# Altium PCB Залозных.PcbDoc
Units mm, origin at the board's own origin, x right, y up, seen from the top; angles counter-clockwise.
Board outline 50 x 110 mm, 2 copper layers (Top Layer, Bottom Layer), stack 0.274 mm thick; 62 components, 44 nets, 228 pads, 22 vias.
Unrouted connection lines stored in the file: 1.
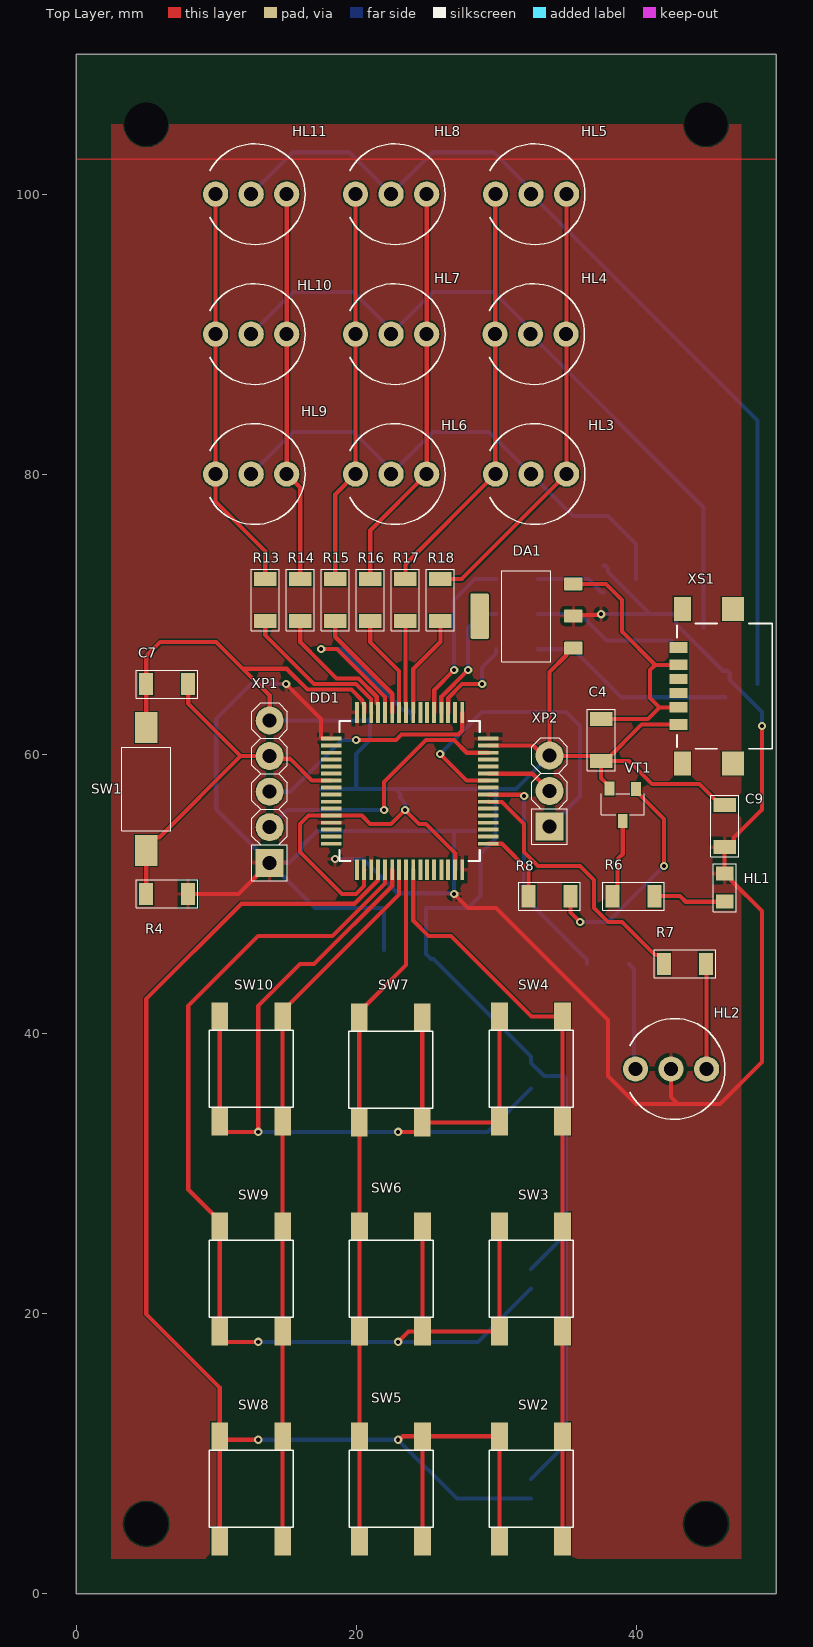
[diagram p0: Top Layer view]
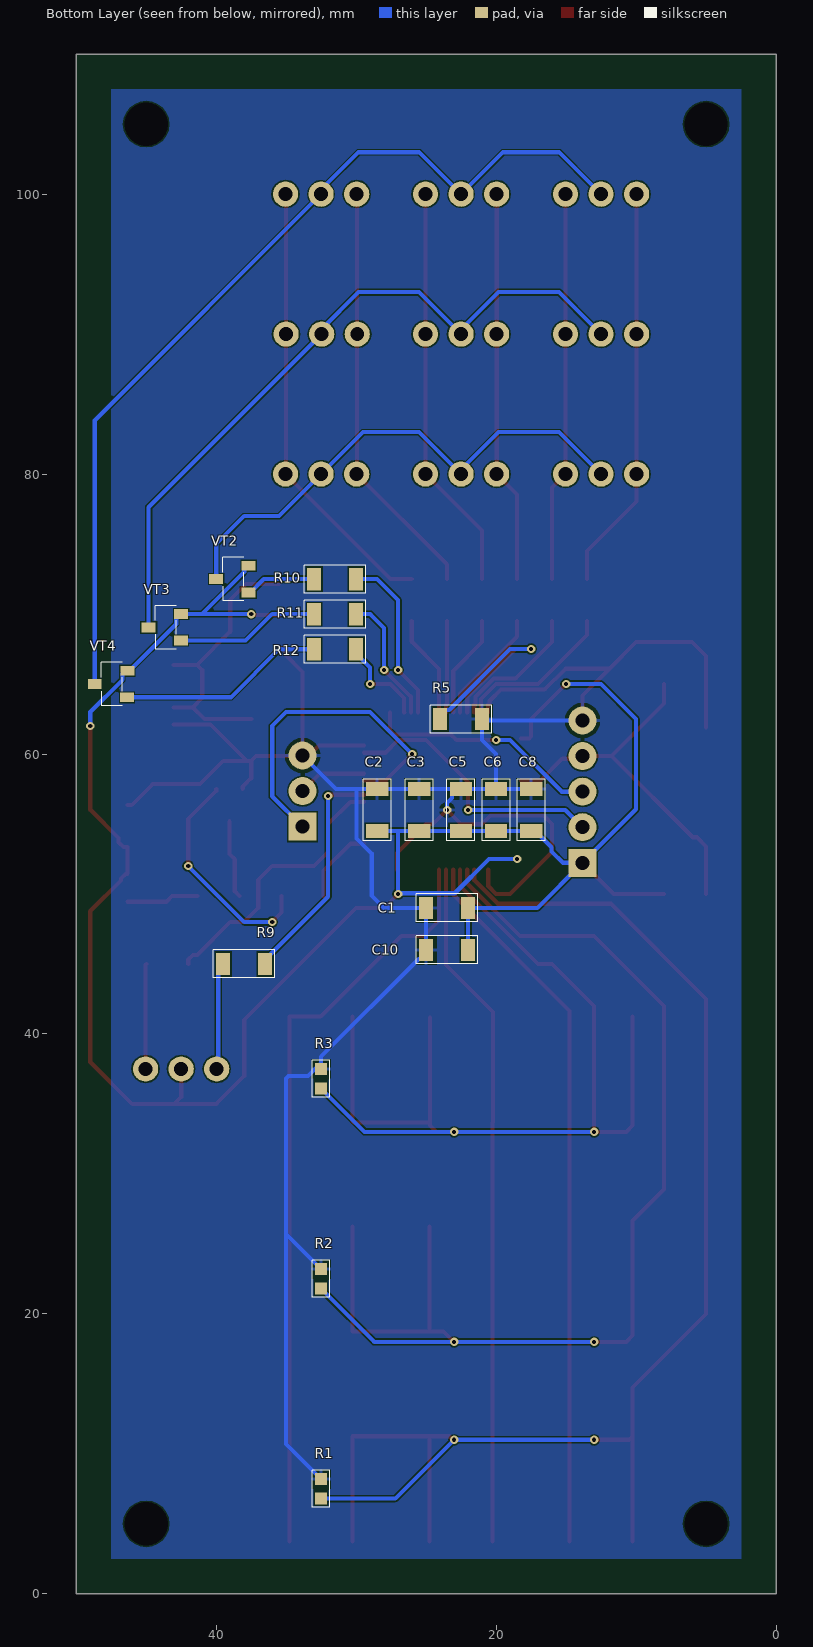
[diagram p1: Bottom Layer view, seen from below]
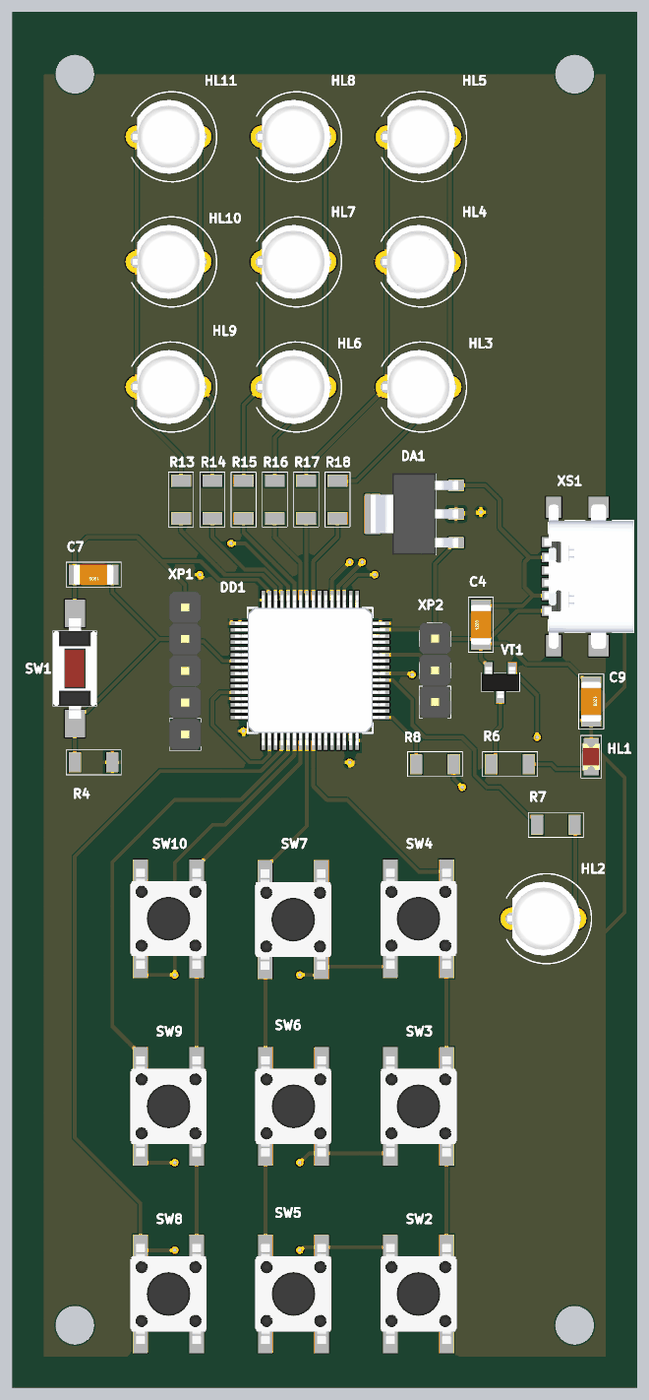
[diagram p2: 3D render of the assembled board from above, using the file's embedded part models]
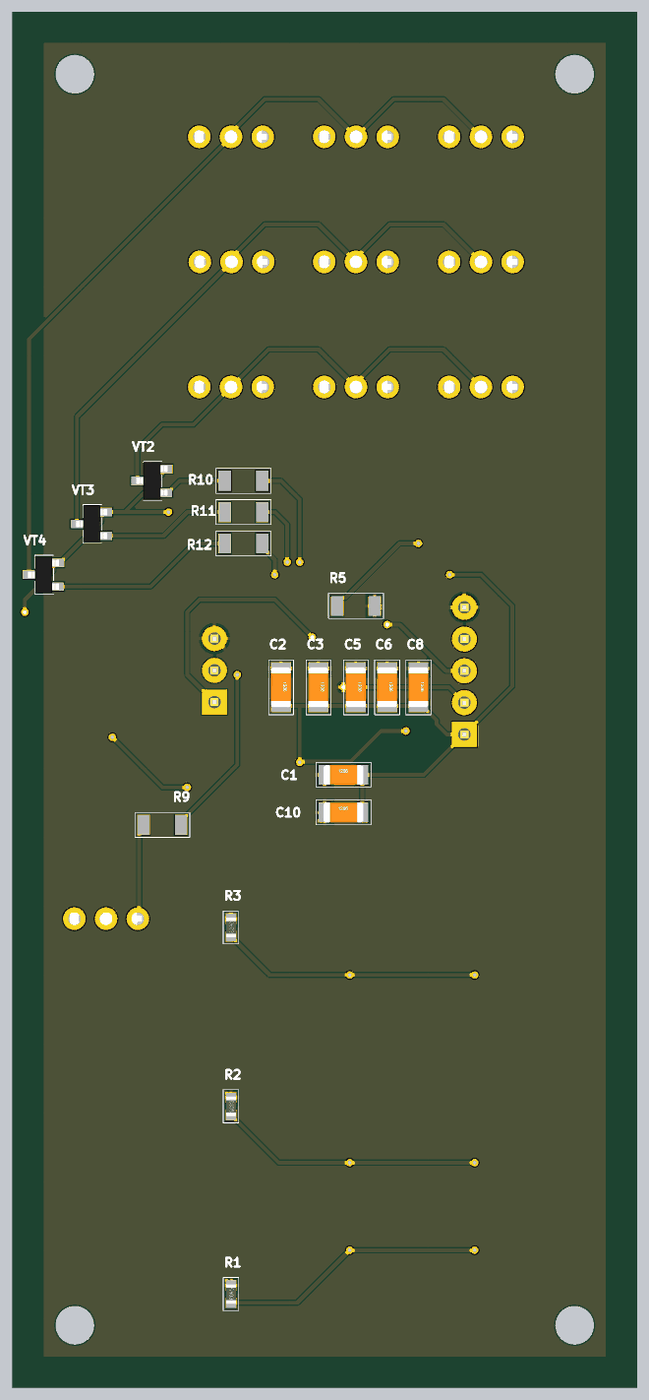
[diagram p3: 3D render of the assembled board from below, using the file's embedded part models]

## Layer stack, top to bottom
Top Solder: solder mask 0.0102, Solder Resist, Dk 3.5
Top Layer: signal copper 0.0356
Dielectric 1: core 0.2032, FR-4, Dk 4.6
Bottom Layer: signal copper 0.0356
Bottom Solder: solder mask 0.0102, Solder Resist, Dk 3.5

## Board outline
0,0 50,0 50,110 0,110

## Design rules (kind name [scope] priority, off if disabled: settings)
Clearance [All] p1: gap=0.1 ignorepadtopadclearanceinfootprint=FALSE
PolygonConnect [All] p1: connectstyle=Relief reliefconductorwidth=0.254 reliefentries=4 polygonreliefangle="90 Angle" airgapwidth=0.254
RoutingVias [All] p1: holewidth=0.711 width=1.27 viastyle="Through Hole" minholewidth=0.3 minwidth=0.6 maxholewidth=0.711 maxwidth=1.27
SolderMaskExpansion [All] p1: expansion=0.102 istentingtop=FALSE
Width [All] p1: maxlimit=0.5 minlimit=0.1 preferedwidth=0.3
30 further rules are at their usual default settings.

## Classes and differential pairs
component class Sheet1: C1 C2 C3 C4 C5 C6 C7 C8 C9 C10 DA1 DD1 HL1 HL2 HL3 HL4 HL5 HL6 HL7 HL8 HL9 HL11 R1 R2 R3 R4 R5 R6 R7 R8 R9 R10 R11 R12 R13 R14 R15 R16 R17 R18 SW1 SW2 SW3 SW4 SW5 SW6 SW7 SW8 SW9 SW10 VT1 VT2 VT3 VT4 XP1 XP2 XS1

## Components (designator, comment, footprint, x,y, rotation, side; value= is the part's Value field where it differs from the comment)
C1 "10 нФ" "CAP: 1206" 23.5,49 r180 bottom
C2 "100 нФ" "CAP: 1206" 28.5,56 r270 bottom
C3 "100 нФ" "CAP: 1206" 25.5,56 r270 bottom
C4 "10 мкФ" "CAP: 1206" 37.5,61 r90 top
C5 "100 нФ" "CAP: 1206" 22.509,56 r270 bottom
C6 "100 нФ" "CAP: 1206" 20.004,56 r270 bottom
C7 "10 мкФ" "CAP: 1206" 6.5,65 r180 top
C8 "10 мкФ" "CAP: 1206" 17.5,56 r270 bottom
C9 "1 мкФ" "CAP: 1206" 46.325,54.85 r270 top
C10 "22 мкФ" "CAP: 1206" 23.5,46 r180 bottom
DA1 "LM7805ACT" AMS1117-3.3 32.17,69.85 r180 top
DD1 "MK" QFP50P1200X1200X160-64N 23.825,57.35 r0 top
HL1 "LED" "LED: 0805R" 46.325,50.446 r270 top
HL2 "Bi_LED_OA" "LED: 5mm bi_color" 42.5,37.5 r0 top
HL3 "Bi_LED_OA" "LED: 5mm bi_color" 32.5,80 r0 top
HL4 "Bi_LED_OA" "LED: 5mm bi_color" 32.46,90 r0 top
HL5 "Bi_LED_OA" "LED: 5mm bi_color" 32.5,100 r0 top
HL6 "Bi_LED_OA" "LED: 5mm bi_color" 22.5,80 r0 top
HL7 "Bi_LED_OA" "LED: 5mm bi_color" 22.5,90 r0 top
HL8 "Bi_LED_OA" "LED: 5mm bi_color" 22.5,100 r0 top
HL9 "Bi_LED_OA" "LED: 5mm bi_color" 12.5,80 r0 top (schematic designator HL10)
HL10 "Bi_LED_OA" "LED: 5mm bi_color" 12.5,90 r0 top (schematic designator HL9)
HL11 "Bi_LED_OA" "LED: 5mm bi_color" 12.5,100 r0 top
R1 "2 кОм" "RES: 0603" 32.5,7.5 r270 bottom
R2 "2 кОм" "RES: 0603" 32.5,22.5 r270 bottom
R3 "2 кОм" "RES: 0603" 32.5,36.8 r270 bottom
R4 "10 кОм" "RES: 1206"#1 6.5,50 r0 top
R5 "10 кОм" "RES: 1206"#1 22.5,62.5 r0 bottom
R6 "50 Ом" "RES: 1206"#1 39.825,49.85 r0 top
R7 "200 Ом" "RES: 1206"#1 43.5,45 r180 top
R8 "2 кОм" "RES: 1206"#1 33.825,49.85 r0 top
R9 "200 Ом" "RES: 1206"#1 38,45 r180 bottom
R10 "2 кОм" "RES: 1206"#2 31.5,72.5 r0 bottom
R11 "2 кОм" "RES: 1206"#1 31.5,69.996 r0 bottom
R12 "2 кОм" "RES: 1206"#1 31.5,67.491 r0 bottom
R13 "65 Ом" "RES: 1206"#1 13.5,71 r90 top
R14 "50 Ом" "RES: 1206"#1 16.004,71 r90 top
R15 "65 Ом" "RES: 1206"#1 18.509,71 r90 top
R16 "50 Ом" "RES: 1206"#1 21.013,71 r90 top
R17 "65 Ом" "RES: 1206"#1 23.517,71 r90 top
R18 "50 Ом" "RES: 1206"#1 26.021,71 r90 top
SW1 "SWITCH_Button" Button_1437566-3 5,57.5 r90 top
SW2 "SWITCH_Button" Button_6mm 32.5,7.5 r90 top
SW3 "SWITCH_Button" Button_6mm 32.5,22.5 r90 top
SW4 "SWITCH_Button" Button_6mm 32.5,37.5 r90 top
SW5 "SWITCH_Button" Button_6mm 22.5,7.5 r270 top
SW6 "SWITCH_Button" Button_6mm 22.5,22.5 r270 top
SW7 "SWITCH_Button" Button_6mm 22.475,37.425 r270 top
SW8 "SWITCH_Button" Button_6mm 12.5,7.5 r90 top
SW9 "SWITCH_Button" Button_6mm 12.5,22.5 r90 top
SW10 "SWITCH_Button" Button_6mm 12.5,37.5 r90 top
VT1 "BC847" BC846B 39.05,56.375 r180 top
VT2 "=Value" BC857 38.825,72.5 r90 bottom
VT3 "=Value" BC857 43.65,69.05 r90 bottom
VT4 "=Value" BC857 47.5,65 r90 bottom
XP1 "ST-LINK" "CON: PLS-5" 13.825,57.31 r90 top
XP2 "USB UART" "CON: PLS-3" 33.825,57.35 r90 top
XS1 "USB_C" USB_type_C 46.325,64.85 r90 top
ZBOAS601991354 "Слой 2" "BOASVIEWlayer:Bottom Layer:1:1:32:1" 105,2290 r90 top (schematic designator fewf)
ZBOAS601994503 "Comment" "BOASVIEWside:Вид платы слева:1:0:0:0" 105,2370 r270 top
ZBOAS601995685 "Слой 1" "BOASVIEWlayer:Top Layer:1:1:1:1" 105,2400 r90 top (schematic designator fewf)
ZBOAS810698153 "Comment" "BOASVIEWdrill:Таблица отверстий:0:0:0:0" 158,2462.7 r0 top

## Footprints (in the part's own frame and the unit in brackets; to place one, negate y for a bottom-side part, rotate by r counter-clockwise, add the part's x,y. Pads: shape width x height; smd on the part's side, far side on the other; paste and mask are expansions set on the pad)
AMS1117-3.3 [mm]
  rrect15% 1.31x0.93 smd paste-0.025 mask+0.05: 1(-3.345,2.29) 2(-3.345,0) 3(-3.345,-2.29)
  rrect15% 1.31x3.24 smd paste-0.025 mask+0.05: 4(3.345,0)
  silkscreen extent -1.75,-3.25 1.75,3.25, body extent -3.5,-3.25 3.5,3.25, height 1.8
BC846B [mm]
  rect 0.7x1 smd paste-0.025 mask+0.05: B(-0.95,-1.125) C(0,1.175) E(0.95,-1.15)
  silkscreen extent -1.55,-0.8 1.55,0.7, body extent -1.5,-1.25 1.5,1.25, height 1.05
BC857 [mm]
  rect 0.7x1 smd paste-0.025 mask+0.05: B(-0.95,-1.125) C(0,1.175) E(0.95,-1.15)
  silkscreen extent -1.55,-0.8 1.55,0.7, body extent -1.5,-1.25 1.5,1.25, height 1.05
"BOASVIEWdrill:Таблица отверстий:0:0:0:0" [mm]
"BOASVIEWlayer:Bottom Layer:1:1:32:1" [mm]
"BOASVIEWlayer:Top Layer:1:1:1:1" [mm]
"BOASVIEWside:Вид платы слева:1:0:0:0" [mm]
Button_6mm [mm]
  rect 2x1.2 smd paste-0.025 mask+0.05: 1(-3.75,2.25) 1(3.75,2.25) 2(-3.75,-2.25) 2(3.75,-2.25)
  silkscreen extent -2.75,-3 2.75,3, body extent -4,-3 4,3, height 5.1
Button_1437566-3 [mm]
  rect 2.2x1.6 smd: 1(-4.4,0) 2(4.4,0)
  silkscreen extent -3,-1.75 3,1.75, body extent -4,-1.75 4,1.75, height 4.3
"CAP: 1206" [mm]
  rect 1x1.6 smd paste-0.025 mask+0.05: 1(-1.5,0) 2(1.5,0)
  silkscreen extent -2.2,-1 2.2,1, body extent -1.6,-0.8 1.6,0.8, height 1
"CON: PLS-3" [mm]
  rect 2x2 hole 1 paste-0.025 mask+0.05: 1(-2.54,0)
  round 2 hole 1 paste-0.025 mask+0.05: 2(0,0) 3(2.54,0)
  silkscreen extent -3.81,-1.27 3.81,1.27, body extent -3.81,-1.27 3.81,1.27, height 8.54
"CON: PLS-5" [mm]
  rect 2x2 hole 1: 1(-5.08,0)
  round 2 hole 1: 2(-2.54,0) 3(0,0) 4(2.54,0) 5(5.08,0)
  silkscreen extent -6.35,-1.27 6.35,1.27, body extent -6.35,-1.27 6.35,1.27, height 8.54
"LED: 5mm bi_color" [mm]
  round 1.8 hole 1: gre(2.54,0) oa(0,0) red(-2.54,0)
  silkscreen extent -2.94,-3.6 3.85,3.6, body extent -2.89,-2.95 2.94,2.95, height 13.1
"LED: 0805R" [mm]
  rect 1x1.25 smd paste-0.025 mask+0.05: 1(-1,0) 2(1,0)
  silkscreen extent -1.7,-0.82 1.7,0.82, body extent -1.05,-0.67 1.05,0.68, height 0.9
QFP50P1200X1200X160-64N [mil]
  rect 58x11 smd: 1(-221,148) 2(-221,128) 3(-221,108) 4(-221,89) 5(-221,69) 6(-221,49) 7(-221,30) 8(-221,10) 9(-221,-10) 10(-221,-30) 11(-221,-49) 12(-221,-69) 13(-221,-89) 14(-221,-108) 15(-221,-128) 16(-221,-148) 33(221,-148) 34(221,-128) 35(221,-108) 36(221,-89) 37(221,-69) 38(221,-49) 39(221,-30) 40(221,-10) 41(221,10) 42(221,30) 43(221,49) 44(221,69) 45(221,89) 46(221,108) 47(221,128) 48(221,148)
  rect 11x58 smd: 17(-148,-221) 18(-128,-221) 19(-108,-221) 20(-89,-221) 21(-69,-221) 22(-49,-221) 23(-30,-221) 24(-10,-221) 25(10,-221) 26(30,-221) 27(49,-221) 28(69,-221) 29(89,-221) 30(108,-221) 31(128,-221) 32(148,-221) 49(148,221) 50(128,221) 51(108,221) 52(89,221) 53(69,221) 54(49,221) 55(30,221) 56(10,221) 57(-10,221) 58(-30,221) 59(-49,221) 60(-69,221) 61(-89,221) 62(-108,221) 63(-128,221) 64(-148,221)
  silkscreen extent -197,-197 197,197, body extent -236,-236 236,236, height 64
"RES: 0603" [mm]
  rect 0.85x0.85 smd paste-0.025 mask+0.05: 1(-0.7,0) 2(0.7,0)
  silkscreen extent -1.33,-0.63 1.33,0.63, body extent -0.8,-0.4 0.8,0.4, height 0.44
"RES: 1206"#1 [mm]
  rect 1x1.6 smd paste-0.025 mask+0.05: 1(-1.5,0) 2(1.5,0)
  silkscreen extent -2.2,-1 2.2,1, body extent -1.58,-0.82 1.58,0.82, height 0.53
"RES: 1206"#2 [mm]
  rect 1x1.6 smd: 1(-1.5,0) 2(1.5,0)
  silkscreen extent -2.2,-1 2.2,1, body extent -1.58,-0.83 1.57,0.82, height 0.53
USB_type_C [mm]
  rect 0.76x1.3 smd: 1(-1.52,3.29) 1(1.52,3.29)
  rect 0.8x1.3 smd: 2(-2.75,3.29) 2(2.75,3.29)
  rect 0.7x1.3 smd: A5(-0.5,3.29) B5(0.5,3.29)
  rect 1.7x1.2 smd: SH1(-5.52,3) SH2(5.52,3)
  rect 1.7x1.6 smd: SH3(-5.52,-0.6) SH4(5.52,-0.6)
  silkscreen extent -4.47,-3.4 4.47,3.4, body extent -5.77,-3.4 5.77,3.74, height 3.16

## Part data
C1 C2 C3 C4 C5 C6 C7 C8 C9 C10: library part Capacitor
DA1: library part Stabilizator, Manufacturer_Name="ON Semiconductor", Mouser Part Number=512-LM7805ACT, Arrow Part Number=LM7805ACT, Arrow Price/Stock=https://www.arrow.com/en/products/lm7805act/on-semiconductor, Datasheet Link=https://componentsearchengine.com/Datasheets/2/LM7805ACT.pdf, Height=4.7mm, Manufacturer_Part_Number=LM7805ACT, Mouser Price/Stock=https://www.mouser.co.uk/ProductDetail/ON-Semiconductor-Fairchild/LM7805ACT?qs=VOMQJJE%252BBNlQknJDd4ZVLg%3D%3D
R1 R2 R3 R4 R5 R6 R7 R8 R9 R10 R11 R12 R13 R14 R15 R16 R17 R18: library part R
VT1: library part VT_bc846
VT2 VT3 VT4: library part VT_bc856
XP1: library part "ST LINK"

## Free pads (board coordinates)
  round 0 hole 3.1 unplated: 2(5,5) 3(45,5) 4(5,105) 5(45,105)

## Via types
v1: diameter 0.6, hole 0.3, Top Layer to Bottom Layer, 22 vias

## Nets (pads, with @x,y where several pads share a name; then routed paths per layer and width w, separated by ;. In a path a pad name is that pad's centre, name@x,y a point inside that pad or via, vN(x,y) a via of type N, cw(c..) or ccw(c..) an arc to the next point about the centre after c; other vN are vias at no path point)
+3.3: C1.2 C2.2 C3.2 C5.2 C6.2 C8.2 C9.2 C10.2 DA1.2 DD1.1 DD1.13 DD1.19 DD1.32 DD1.48 DD1.64 HL1.1 HL2.oa R4.2 VT2.E VT3.E VT4.E XP1.1 | length 156.4
  Top Layer w0.3: R4.2 11.595,50 XP1.1 ; v1(15,65) 17.5,62.5 17.5,61.244 17.635,61.109 DD1.1 ; v1(27,50) 28,49 30,49 38,41 38,37 40,35 43,35 ; DA1.2 35.608,69.943 37.443,69.943 v1(37.5,70) ; HL2.oa 42.5,35.5 43,35 ; v1(49,62) 49,56.025 46.975,54 46.975,53.7 46.625,53.35 C9.2 HL1.1 46.45,51.446 46.8,51.096 46.8,50.971 49,48.771 49,38 46,35 43,35
  Bottom Layer w0.3: v1(15,65) 12.5,65 10,62.5 10,56.055 XP1.1 ; v1(18.5,52.5) 20.5,52.5 22.95,50.05 26.95,50.05 v1(27,50) 27,54.5 ; C10.2 C1.2 17.055,49 XP1.1 ; C2.2 27,54.5 ; v1(37.5,70) 41,70 ; VT2.E 37.8,73.45 38,73.25 38,73 41,70 ; v1(49,62) 49,63 46.7,65.3 46.7,65.75 46.5,65.95 VT4.E 46.2,65.95 42.85,69.3 42.85,69.8 42.65,70 VT3.E 41,70 ; XP1.1 15.23,52.23 16.04,53.04 16.04,53.34 17.2,54.5 C8.2 C6.2 C5.2 C3.2 27,54.5
+5: C4.2 DA1.3 XS1.1 | length 20.6
  Top Layer w0.3: DA1.3 37.86,72.14 39,71 39,68.74 41.37,66.37 ; C4.2 40.84,62.5 41.67,63.33 ; XS1.1@43.035,63.33 41.67,63.33 ; XS1.1@43.035,66.37 41.37,66.37 ; 41.37,66.37 41,66 41,64 41.67,63.33
GND: C1.1 C2.1 C3.1 C4.1 C5.1 C6.1 C7.2 C8.1 C9.1 C10.1 DA1.1 DD1.12 DD1.18 DD1.31 DD1.47 DD1.63 R1.1 R2.1 R3.1 R5.1 SW1.2 VT1.E XP1.5 XP2.3 XS1.2 | length 181.9
  Top Layer w0.3: SW1.2 C7.2 5,67 6,68 10,68 11.913,66.088 ; XP1.5 13.825,64.175 11.913,66.088 ; DD1.18 20.563,51.726 20.563,50.563 20,50 19,50 16,53 16,55 16.597,55.597 DD1.12 20.403,55.597 21,55 22.5,55 v1(23.5,56) 24.5,55 25,55 27.076,52.924 DD1.31 ; DD1.63 20.574,63.54 20.455,63.658 20.455,63.804 19.659,64.6 16.53,64.6 15.042,66.088 11.913,66.088 ; DD1.47 32.654,60.601 33.365,59.89 XP2.3 ; DA1.1 35.325,67.56 35.01,67.245 35.01,67.055 33.825,65.87 XP2.3 ; VT1.E 38.1,57.675 37.5,58.275 C4.1 ; XS1.2@43.035,62.1 40.4,62.1 C4.1@37.8,59.5 ; C9.1 46.025,56.35 44.525,57.85 41.15,57.85 39.5,59.5 C4.1@37.8,59.5 ; XP2.3 33.865,59.85 37.15,59.85 C4.1 ; C4.1 C4.1@37.8,59.5
  Bottom Layer w0.3: XP1.5 20.89,62.39 R5.1 21,61 20.004,60.004 C6.1 ; C8.1 C6.1 ; v1(23.5,56) 23.5,56.509 23.159,56.85 23.159,57.15 C5.1@22.809,57.5 ; R1.1 35,10.7 35,25.7 ; R2.1 35,25.7 ; XP2.3 31.435,57.5 29.967,57.5 ; C6.1 C5.1 C5.1@22.809,57.5 ; C5.1@22.809,57.5 C3.1 C2.1 29.967,57.5 ; 29.967,57.5 29.967,53.968 28.888,52.888 28.888,49.888 28,49 C1.1 C10.1 25,45.7 25.35,45.35 25.525,45.35 32.5,38.375 32.5,37.937 33.437,37 34.824,37 35,36.824 35,25.7
NetC7_1: C7.1 DD1.7 R4.1 SW1.1 XP1.4 | length 26.7
  Top Layer w0.3: R4.1 SW1.1 5,53.4 5.65,54.05 5.95,54.05 11.75,59.85 ; C7.1 8,63.6 11.75,59.85 ; DD1.7 16.829,58.112 15.275,59.666 14.009,59.666 XP1.4 11.75,59.85
NetDD1_20: DD1.20 R1.2 SW2.1 SW5.1 SW8.1 | length 108.2
  Top Layer w0.3: SW8.1@10.25,3.75 SW8.1@10.25,11.25 ; v1(13,11) 10.5,11 SW8.1@10.25,11.25 ; DD1.20 21.554,51.726 21.554,50.979 19.875,49.3 11.8,49.3 5,42.5 5,20 10.25,14.75 SW8.1@10.25,11.25 ; v1(23,11) 23.081,11 23.331,11.25 SW5.1@24.75,11.25 ; SW5.1@24.75,3.75 SW5.1@24.75,11.25 ; SW2.1@30.25,3.75 30.25,11.25 SW5.1@24.75,11.25
  Bottom Layer w0.3: v1(13,11) v1(23,11) 27.2,6.8 R1.2
NetDD1_21: DD1.21 R2.2 SW3.1 SW6.1 SW9.1 | length 90.3
  Top Layer w0.3: v1(13,18) 10.7,18 10.25,18.45 10.25,18.75 10.25,26.25 10.25,26.65 8,28.9 8,42 13,47 18.3,47 22.062,50.762 22.062,51.16 22.062,51.726 DD1.21 DD1.21@22.072,51.16 ; v1(23,18) 23.75,18.75 SW6.1@24.75,18.75 ; SW6.1@24.75,26.25 SW6.1@24.75,18.75 ; SW3.1@30.25,26.25 30.25,18.75 SW6.1@24.75,18.75
  Bottom Layer w0.3: v1(13,18) v1(23,18) 28.7,18 R2.2
NetDD1_22: DD1.22 R3.2 SW4.1 SW7.1 SW10.1 | length 77.5
  Top Layer w0.3: SW10.1@10.25,41.25 10.25,33.75 10.25,33.45 10.7,33 v1(13,33) 13,42 16,45 17,45 22.58,50.58 DD1.22 ; v1(23,33) 24.275,33 24.725,33.45 SW7.1@24.725,33.675 ; SW7.1@24.725,41.175 SW7.1@24.725,33.675 ; SW4.1@30.25,41.25 30.25,33.75 30.175,33.675 SW7.1@24.725,33.675
  Bottom Layer w0.3: v1(13,33) v1(23,33) 29.4,33 R3.2
NetDD1_26: DD1.23 SW8.2 SW9.2 SW10.2 | length 51.4
  Top Layer w0.3: SW8.2@14.75,3.75 14.75,11.25 14.75,18.75 14.75,26.25 14.75,33.75 14.75,41.25 14.75,41.65 23.063,49.963 DD1.23
NetDD1_27: DD1.24 SW5.2 SW6.2 SW7.2 | length 49.4
  Top Layer w0.3: SW5.2@20.25,3.75 20.25,11.25 20.25,18.75 20.25,26.25 20.25,33.65 20.225,33.675 20.225,41.175 20.225,41.575 23.571,44.921 DD1.24
NetDD1_28: DD1.25 SW2.2 SW3.2 SW4.2 | length 54.6
  Top Layer w0.3: DD1.25 24.079,48.097 25.176,47 26.775,47 32.525,41.25 34.75,41.25 34.75,33.75 34.75,26.25 34.75,18.75 34.75,11.25 SW2.2@34.75,3.75
NetDD1_33: DD1.33 R8.1 | length 5.5
  Top Layer w0.3: DD1.33 30.409,53.591 32.325,51.675 R8.1
NetDD1_39: DD1.39 R7.2 | length 19.9
  Top Layer w0.3: DD1.39 29.449,56.578 30.422,56.578 32,55 32,53 33,52 36,52 37,51 37,49 38,48 39,48 41.35,45.65 41.65,45.65 42,45.3 R7.2
NetDD1_40: DD1.40 R9.2 | length 16.5
  Top Layer w0.3: DD1.40 31.823,57.096 31.919,57 v1(32,57)
  Bottom Layer w0.3: v1(32,57) 32,49.8 36.5,45.3 R9.2
NetDD1_42: DD1.42 XP2.1 | length 24
  Top Layer w0.3: v1(26,60) 27.888,58.112 DD1.42
  Bottom Layer w0.3: v1(26,60) 29,63 35,63 36,62 36,56.985 XP2.1
NetDD1_43: DD1.43 XP2.2 | length 4.9
  Top Layer w0.3: DD1.43 32.58,58.595 XP2.2
NetDD1_46: DD1.46 XP1.2 | length 19.7
  Top Layer w0.3: v1(22,56) 22,58 25,61 27,61 27.907,60.093 DD1.46
  Bottom Layer w0.3: XP1.2 15.055,56 v1(22,56)
NetDD1_49: DD1.49 XP1.3 | length 16.9
  Top Layer w0.3: v1(20,61) 22.841,61 23.241,61.4 27.3,61.4 27.584,61.684 DD1.49
  Bottom Layer w0.3: XP1.3 15.31,57.31 19,61 v1(20,61)
NetDD1_51: DD1.51 R12.1 | length 6.8
  Top Layer w0.3: DD1.51 26.578,62.974 26.578,64.013 27.566,65 v1(29,65)
  Bottom Layer w0.3: v1(29,65) 29,66.191 30,67.191 R12.1
NetDD1_52: DD1.52 R11.1 | length 9.2
  Top Layer w0.3: DD1.52 26.086,64.086 v1(28,66)
  Bottom Layer w0.3: v1(28,66) 28,69 28.996,69.996 R11.1
NetDD1_53: DD1.53 R10.1 | length 12.2
  Top Layer w0.3: DD1.53 25.578,64.578 v1(27,66)
  Bottom Layer w0.3: v1(27,66) 27,71 28.5,72.5 R10.1
NetDD1_56: DD1.56 R18.1 | length 7.3
  Top Layer w0.3: DD1.56 24.079,66.079 26.021,68.021 R18.1
NetDD1_57: DD1.57 R17.1 | length 6.6
  Top Layer w0.3: R17.1 23.517,63.594 23.571,63.54 DD1.57
NetDD1_58: DD1.58 R16.1 | length 7.4
  Top Layer w0.3: R16.1 21.013,68.013 21,68 23.063,65.937 DD1.58
NetDD1_59: DD1.59 R15.1 | length 8.2
  Top Layer w0.3: R15.1 18.509,68.381 22.58,64.309 DD1.59
NetDD1_60: DD1.60 R5.2 | length 15.8
  Top Layer w0.3: v1(17.5,67.5) 18.631,67.5 22.062,64.069 22.062,62.974 DD1.60
  Bottom Layer w0.3: v1(17.5,67.5) 19,67.5 23.35,63.15 23.65,63.15 24,62.8 R5.2
NetDD1_61: DD1.61 R14.1 | length 9.8
  Top Layer w0.3: R14.1 16.004,67.996 17.5,66.5 18.6,65.4 20.166,65.4 21.471,64.094 21.471,63.633 21.564,63.54 DD1.61
NetDD1_62: DD1.62 R13.1 | length 11.4
  Top Layer w0.3: R13.1 13.5,68.5 17,65 20,65 21.071,63.929 21.071,62.974 DD1.62
NetHL1_2: HL1.2 R6.2 | length 5.2
  Top Layer w0.3: R6.2 43.15,49.85 43.554,49.446 HL1.2
NetHL2_gre: HL2.gre R7.1 | length 7.5
  Top Layer w0.3: R7.1 45.04,44.96 HL2.gre
NetHL2_red: HL2.red R9.1 | length 7.7
  Bottom Layer w0.3: R9.1 39.85,44.65 39.85,37.61 HL2.red
NetHL3_gre: HL3.gre HL4.gre HL5.gre R18.2 | length 32.2
  Top Layer w0.3: R18.2 27.54,72.5 HL3.gre 35.02,80.02 35.02,89.98 HL4.gre 35.02,90.02 35.02,99.98 HL5.gre
NetHL3_oa: HL3.oa HL6.oa HL9.oa VT2.C | length 37.2
  Bottom Layer w0.3: HL9.oa 15.5,83 19.824,83 22.5,80.324 HL6.oa 25.5,83 29.5,83 HL3.oa 35.5,77 38,77 40,75 VT2.C
NetHL3_red: HL3.red HL4.red HL5.red R17.2 | length 30.2
  Top Layer w0.3: R17.2 23.517,73.557 HL3.red 29.94,80.02 29.94,89.98 HL4.red 29.94,90.02 29.94,99.98 HL5.red
NetHL4_oa: HL4.oa HL7.oa HL10.oa VT3.C | length 51.4
  Bottom Layer w0.3: HL10.oa 15.5,93 19.824,93 22.5,90.324 HL7.oa 25.5,93 29.824,93 32.46,90.364 HL4.oa 44.825,77.635 VT3.C
NetHL5_oa: HL5.oa HL8.oa HL11.oa VT4.C | length 66.9
  Bottom Layer w0.3: HL11.oa 15.5,103 19.5,103 HL8.oa 25.5,103 29.824,103 32.5,100.324 HL5.oa 48.675,83.825 VT4.C
NetHL6_gre: HL6.gre HL7.gre HL8.gre R16.2 | length 29.2
  Top Layer w0.3: R16.2 21.013,75.973 HL6.gre HL7.gre HL8.gre
NetHL6_red: HL6.red HL7.red HL8.red R15.2 | length 28.1
  Top Layer w0.3: R15.2 18.509,78.549 HL6.red HL7.red HL8.red
NetHL9_gre: HL9.gre HL10.gre HL11.gre R14.2 | length 28
  Top Layer w0.3: HL11.gre@15,100 HL11.gre@15.02,99.98 ; HL11.gre HL10.gre HL9.gre 16.004,79.036 R14.2 ; HL9.gre@15.52,80.02 HL9.gre@15.54,80
NetHL9_red: HL9.red HL10.red HL11.red R13.2 | length 29
  Top Layer w0.3: HL11.red@9.92,100 9.96,99.96 HL10.red HL9.red 9.96,78.04 13.5,74.5 R13.2 ; HL9.red@10.44,80.02 HL9.red@10.46,80
NetR6_1: R6.1 VT1.C | length 5.7
  Top Layer w0.3: R6.1 38.675,50.2 38.675,52.488 39.05,52.863 VT1.C
NetR8_2: R8.2 VT1.B | length 16.1
  Top Layer w0.3: R8.2 35.325,48.675 v1(36,48) ; VT1.B 40,57.35 42,55.35 v1(42,52)
  Bottom Layer w0.3: v1(36,48) 38,48 v1(42,52)
NetR10_2: R10.2 VT2.B | length 5.1
  Bottom Layer w0.3: R10.2 36.6,72.5 37.55,71.55 VT2.B
NetR11_2: R11.2 VT3.B | length 10.3
  Bottom Layer w0.3: R11.2 33.004,70 36,70 37.9,68.1 VT3.B
NetR12_2: R12.2 VT4.B | length 14.8
  Bottom Layer w0.3: R12.2 35.509,67.491 38.95,64.05 VT4.B
pads on no net: DA1.4 DD1.2 DD1.3 DD1.4 DD1.5 DD1.6 DD1.8 DD1.9 DD1.10 DD1.11 DD1.14 DD1.15 DD1.16 DD1.17 DD1.26 DD1.27 DD1.28 DD1.29 DD1.30 DD1.34 DD1.35 DD1.36 DD1.37 DD1.38 DD1.41 DD1.44 DD1.45 DD1.50 DD1.54 DD1.55 XS1.A5 XS1.B5 XS1.SH1 XS1.SH2 XS1.SH3 XS1.SH4

## Polygon pours and split planes (outlines as drawn)
+3.3 on Top Layer "+3.3_L01_P002" (solid, remove dead copper, pour order 2): 2.5,105 47.5,105 47.5,2.5 2.5,2.5
no net on Top Layer "NONET_L01_P000" (solid, pour order 0): 2.5,102.5 50,102.5 0,102.5
GND on Bottom Layer "GND_L02_P003" (solid, remove dead copper, pour order 3): 2.5,107.5 47.5,107.5 47.5,2.5 2.5,2.5

## Silkscreen, mask and mechanical layers (free items; w line width, h text height)
Mechanical 7:
  text "BOASFORMAT|А3|1|0|883070867|165354330|1000000000|1:1|" at -47.9,2509.6 h0
  text "DimV|39370|-19685039|16889764|976535433|-2559055|-7795275|1||||js12|False|False|False|False" at -5,2450 h0
  text "DimH|-43307089|7|60196855|976535435|-20000004|2598423|1||||js12|False|False|False|False" at 105,2450 h0
  text "DimV|0|-275590|60196851|945118110|1574803|2440945|1||||js12|False|False|False|False" at 105,2370.2 h0
Mechanical 8:
  region: 108.908,2369.408 108.261,2367.715 107.77,2364.001 108.904,2364 108.905,2364.932 108.342,2364.5 108.997,2369.407
  region: 109.092,2369.408 109.739,2367.715 110.23,2364.001 109.096,2364 109.095,2364.932 109.658,2364.5 109.003,2369.407
  region: 109.092,2370.292 109.739,2371.985 110.23,2375.699 109.096,2375.7 109.095,2374.768 109.658,2375.2 109.003,2370.293
  region: 108.908,2370.292 108.261,2371.985 107.77,2375.699 108.904,2375.7 108.905,2374.768 108.342,2375.2 108.997,2370.293
  region: -4.908,2456.508 -3.215,2455.861 0.499,2455.37 0.5,2456.504 -0.432,2456.505 0,2455.942 -4.907,2456.597
  region: -4.908,2456.692 -3.215,2457.339 0.499,2457.83 0.5,2456.696 -0.432,2456.695 0,2457.258 -4.907,2456.603
  region: 104.908,2456.692 103.215,2457.339 99.501,2457.83 99.5,2456.696 100.432,2456.695 100,2457.258 104.907,2456.603
  region: 104.908,2456.508 103.215,2455.861 99.501,2455.37 99.5,2456.504 100.432,2456.505 100,2455.942 104.907,2456.597
  region: -11.408,2400.092 -10.761,2401.785 -10.27,2405.499 -11.404,2405.5 -11.405,2404.568 -10.842,2405 -11.497,2400.093
  region: -11.592,2400.092 -12.239,2401.785 -12.73,2405.499 -11.596,2405.5 -11.595,2404.568 -12.158,2405 -11.503,2400.093
  region: -11.592,2449.908 -12.239,2448.215 -12.73,2444.501 -11.596,2444.5 -11.595,2445.432 -12.158,2445 -11.503,2449.907
  region: -11.408,2449.908 -10.761,2448.215 -10.27,2444.501 -11.404,2444.5 -11.405,2445.432 -10.842,2445 -11.497,2449.907
Mechanical 9:
  region: 109,2369.5 109.658,2364.5 109,2365 108.342,2364.5
  region: 109,2370.2 108.342,2375.2 109,2374.7 109.658,2375.2
  region: -5,2456.6 0,2457.258 -0.5,2456.6 0,2455.942
  region: 105,2456.6 100,2455.942 100.5,2456.6 100,2457.258
  region: -11.5,2400 -12.158,2405 -11.5,2404.5 -10.842,2405
  region: -11.5,2450 -10.842,2445 -11.5,2445.5 -12.158,2445
  lines w0.18: -12.5,2400 -5,2400 ; -12.5,2450 -4.9,2450 ; -11.5,2400 -11.5,2450 ; -5,2450 -5,2457.6 ; -5,2456.6 105,2456.6 ; 105,2369.5 110,2369.5 ; 105,2370.2 110,2370.2 ; 105,2450 105,2457.6 ; 109,2361.5 109,2388.674
  text "110" at 46.26,2459.13 h7
  text "50" at -14.03,2421.495 h7 r90
  text "0,7*" at 106.47,2376.08 h7 r90
Mechanical 12:
  text "ИУ4.11.03.03.24.06.63.10.002" at 40.018,2499.77 h6.5 r180
  text "-0,35" at 53.789,2459.2 h4
  text "ИУ4.11.03.03.24.06.63.10.001" at -29.825,2446.885 h5.5 r90
  text "+0,1" at 268.993,2444.8 h4
  text "+0,1" at 222.993,2444.5 h4
  text "-0,1" at 268.989,2441.4 h4
  text "-0,1" at 222.989,2440.6 h4
  text "+0,1" at 219.993,2436.7 h4
  text "+0,1" at 268.993,2436.7 h4
  text "-0,1" at 268.989,2432.7 h4
  text "-0,1" at 219.989,2432.6 h4
  text "-0,25" at -13.9,2428.389 h4 r90
  text "+0,1" at 222.993,2428.4 h4
  text "-0,1" at 222.989,2424.2 h4
  text "1. *Размеры для справок. / 2. Общие допуски по ГОСТ 30893.1-2002: Н12, h12, ±IT/2. / 3. Обшие допуски формы и расположения - ГОСТ 30893.2-2002 - Н. / 4. Шаг координатной сетки 0,01 мм. / 5. Платы изготовить химическим негативным методом. / 6. Класс точности платы по ГОСТ Р 53429-2009 - 4: / - минимальная номинальная ширина проводника - 0,25 мм; / - минимальное номинальное расстояние между элементами / проводяшего рисунка - 0,2 мм. / 7. Параметры отверстий платы приведены в таблиие 1. / 8. Плата должна соответствовать ГОСТ 23752-79, / группа жесткости - 1. / 9. Финишное покрытие металлизированных поверхностей меди по  / ГОСТ 9.301-86, контактных зон - припоем ПОС-61 ГОСТ 21930-76  / толщиной не менее 35 мкм. / 10. Остальные технические требования по ОСТ4 ГО.07004-75." at 163.3,2286.1 h6
  text "ИУ4.11.03.03.24.06.63.10.002" at 254.572,2261.746 h10
  text "Игра \"Крестики-нолики\"" at 254.383,2248.922 h6
  text "Залозных А. О." at 199.404,2243.6 h4
  text "Чистяков М. Г." at 199.456,2238.404 h4
  text "Плата печатная" at 264.686,2237.9 h5
  text "МГТУ им. Н. Э. Баумана" at 323.613,2228.748 h4
  text "FR4-DE104" at 266.683,2227.2 h6
  text "Кафедра ИУ4" at 331.905,2224.548 h4
  text "ТУ 2296-001-39421663-13" at 253.783,2219.8 h6
  text "Группа ИУ4-63Б" at 329.361,2219.648 h4
Mechanical 13:
  lines w0.18: 182.1,2222.6 247.1,2222.6 ; 182.1,2227.6 247.1,2227.6 ; 182.1,2232.6 247.1,2232.6 ; 182.1,2237.6 247.1,2237.6 ; 182.1,2242.6 247.1,2242.6 ; 182.1,2257.6 247.1,2257.6 ; 182.1,2262.6 247.1,2262.6 ; 182.1,2267.6 247.1,2267.6 ; 322.06,2237.6 322.06,2252.6 ; 327.08,2237.6 327.08,2252.6 ; -47.9,2212.6 372.1,2212.6 372.1,2509.6 -47.9,2509.6 -47.9,2212.6
  lines w0.6: -39.9,2242.6 -27.9,2242.6 ; -39.9,2277.6 -27.9,2277.6 ; -39.9,2302.6 -27.9,2302.6 ; -39.9,2327.6 -27.9,2327.6 ; -39.9,2444.6 -27.9,2444.6 ; -34.9,2217.6 -34.9,2362.6 ; -34.9,2384.6 -34.9,2504.6 ; -27.9,2362.6 -39.9,2362.6 -39.9,2217.6 -27.9,2217.6 ; -27.9,2384.6 -39.9,2384.6 -39.9,2504.6 -27.9,2504.6 ; -27.9,2490.6 42.1,2490.6 42.1,2504.6 ; 182.1,2217.6 182.1,2272.6 367.1,2272.6 ; 182.1,2247.6 247.1,2247.6 ; 182.1,2252.6 247.1,2252.6 ; 189.1,2247.6 189.1,2272.6 ; 199.1,2217.6 199.1,2272.6 ; 222.1,2217.6 222.1,2272.6 ; 237.1,2217.6 237.1,2272.6 ; 247.1,2217.6 247.1,2272.6 367.1,2272.6 ; 247.1,2232.6 317.1,2232.6 367.1,2232.6 ; 247.1,2257.6 367.1,2257.6 ; 304.1,2493.6 309.1,2484.6 316.7,2498.6 ; 316.8,2498.6 342.1,2498.6 ; 317.1,2217.6 317.1,2257.6 ; 317.1,2237.6 367.1,2237.6 ; 317.1,2252.6 332.1,2252.6 367.1,2252.6 ; 332.1,2237.6 332.1,2257.6 ; 337.67,2232.6 337.67,2237.6 ; 349.1,2237.6 349.1,2257.6 ; 367.1,2280.6 367.1,2272.6 ; -27.9,2217.6 367.1,2217.6 367.1,2504.6 -27.9,2504.6 ; -27.9,2217.6 -27.9,2504.6
  text "Rz25" at 316.8,2486.3 h10.75
  text "Перв. примен." at -35.706,2460.832 h5.38 r90
  text "Справ. №" at -35.706,2404.633 h5.38 r90
  text "Подп. и дата" at -35.706,2331.491 h5.38 r90
  text "Инв. № дубл." at -35.8,2302.9 h5 r90
  text "Взам. инв. №" at -35.6,2278.4 h4.5 r90
  text "Лит." at 320.395,2253.406 h5.38
  text "Масса" at 334.959,2253.406 h5.38
  text "Масштаб" at 349.102,2253.406 h5.38
  text "Изм." at 181.642,2248.406 h5.38
  text "Лист" at 189.124,2248.406 h5.38
  text "№ докум." at 201.61,2248.406 h5.38
  text "Подп." at 224.557,2248.406 h5.38
  text "Дата" at 236.656,2248.406 h5.38
  text "Подп. и дата" at -35.706,2246.991 h5.38 r90
  text "Разраб." at 182.633,2243.371 h5.38
  text "1:1" at 355.192,2242.679 h7.68
  text "Пров." at 182.633,2238.371 h5.38
  text "Т.контр." at 182.633,2233.371 h5.38
  text "Лист" at 318.542,2233.371 h5.38
  text "Листов" at 339.585,2233.371 h5.38
  text "1" at 359.406,2233.371 h5.38
  text "Н.контр." at 182.633,2223.371 h5.23
  text "Утв." at 182.633,2218.371 h5.38
  text "Инв. № подл." at -35.7,2217.9 h5 r90
  text "Копировал" at 257.633,2213.371 h5.38
  text "Формат А3" at 335.501,2213.371 h5.38

## Text inside footprints (layer, text, board x,y; h text height)
ZBOAS601991354: Mechanical 7 "50" at 114.169,2337.547 h5.38 r90; Mechanical 7 "40" at 114.169,2327.485 h5.38 r90; Mechanical 7 "30" at 114.169,2317.539 h5.38 r90; Mechanical 7 "20" at 114.169,2307.534 h5.38 r90; Mechanical 7 "10" at 114.169,2298.221 h5.38 r90; Mechanical 7 "0" at 114.169,2288.803 h5.38 r90; Mechanical 7 "110" at -3.306,2280.765 h5.38 r90; Mechanical 7 "100" at 6.694,2280.094 h5.38 r90; Mechanical 7 "90" at 16.694,2281.432 h5.38 r90; Mechanical 7 "80" at 26.694,2280.994 h5.38 r90; Mechanical 7 "70" at 36.694,2281.596 h5.38 r90; Mechanical 7 "60" at 46.694,2281.238 h5.38 r90; Mechanical 7 "50" at 56.694,2281.094 h5.38 r90; Mechanical 7 "40" at 66.694,2280.969 h5.38 r90; Mechanical 7 "30" at 76.694,2281.079 h5.38 r90; Mechanical 7 "20" at 86.694,2281.069 h5.38 r90; Mechanical 7 "10" at 96.694,2282.442 h5.38 r90; Mechanical 7 "0" at 106.694,2283.607 h5.38 r90
ZBOAS601995685: Mechanical 7 "50" at 114.169,2447.547 h5.38 r90; Mechanical 7 "40" at 114.169,2437.485 h5.38 r90; Mechanical 7 "30" at 114.169,2427.539 h5.38 r90; Mechanical 7 "20" at 114.169,2417.534 h5.38 r90; Mechanical 7 "10" at 114.169,2408.221 h5.38 r90; Mechanical 7 "0" at 114.169,2398.803 h5.38 r90; Mechanical 7 "110" at -3.306,2390.765 h5.38 r90; Mechanical 7 "100" at 6.694,2390.094 h5.38 r90; Mechanical 7 "90" at 16.694,2391.432 h5.38 r90; Mechanical 7 "80" at 26.694,2390.994 h5.38 r90; Mechanical 7 "70" at 36.694,2391.596 h5.38 r90; Mechanical 7 "60" at 46.694,2391.238 h5.38 r90; Mechanical 7 "50" at 56.694,2391.094 h5.38 r90; Mechanical 7 "40" at 66.694,2390.969 h5.38 r90; Mechanical 7 "30" at 76.694,2391.079 h5.38 r90; Mechanical 7 "20" at 86.694,2391.069 h5.38 r90; Mechanical 7 "10" at 96.694,2392.442 h5.38 r90; Mechanical 7 "0" at 106.694,2393.607 h5.38 r90
ZBOAS810698153: Mechanical 12 "-" at 263.205,2424.679 h7.68; Mechanical 12 "Нет" at 304.657,2424.679 h7.68; Mechanical 12 "3,1" at 214.62,2424.679 h7.68; Mechanical 12 "4" at 341.367,2424.679 h7.68; Mechanical 12 "2,0" at 260.173,2433.279 h7.68; Mechanical 12 "Да" at 306.385,2433.279 h7.68; Mechanical 12 "1" at 217.51,2433.279 h7.68; Mechanical 12 "38" at 339.209,2433.279 h7.68; Mechanical 12 "0,6" at 260.429,2441.279 h7.68; Mechanical 12 "Да" at 306.385,2441.279 h7.68; Mechanical 12 "0,3" at 214.424,2441.279 h7.68; Mechanical 12 "22" at 339.352,2441.279 h7.68; Mechanical 12 "отв." at 337.18,2449.029 h7.68; Mechanical 12 "Кол." at 337.3,2456.529 h7.68; Mechanical 12 "металлизации" at 289.325,2449.029 h7.68; Mechanical 12 "Наличие" at 298.422,2456.529 h7.68; Mechanical 12 "площадки, мм" at 244.245,2449.029 h7.68; Mechanical 12 "Диаметр конт." at 242.503,2456.529 h7.68; Mechanical 12 "мм" at 214.634,2449.029 h7.68; Mechanical 12 "Диаметр отв.," at 197.5,2456.529 h7.68; Mechanical 12 "отв." at 171.352,2449.029 h7.68; Mechanical 12 "Обозначение" at 158.412,2456.529 h7.68; Mechanical 12 "Таблица 1 - Диаметры отверстий" at 158,2464.2 h7.68